# EAGLE board 117_04_TIMER_GATE (EAGLE 9.6.2)
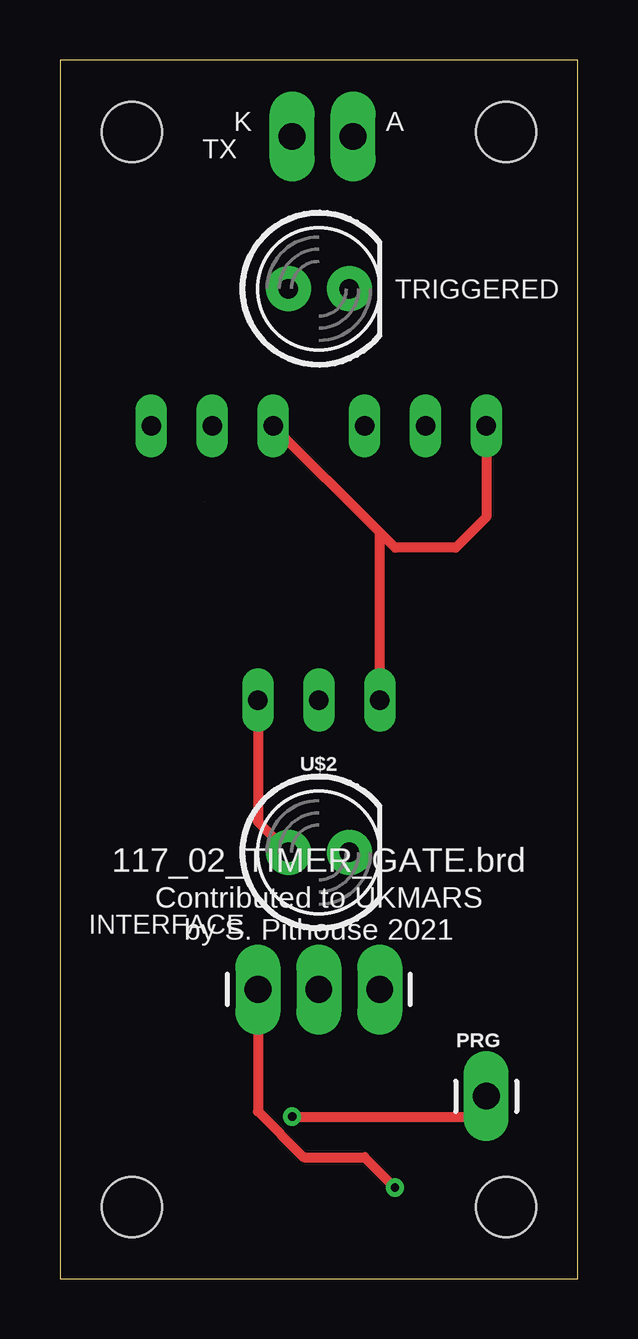
[diagram p0: board, top side]
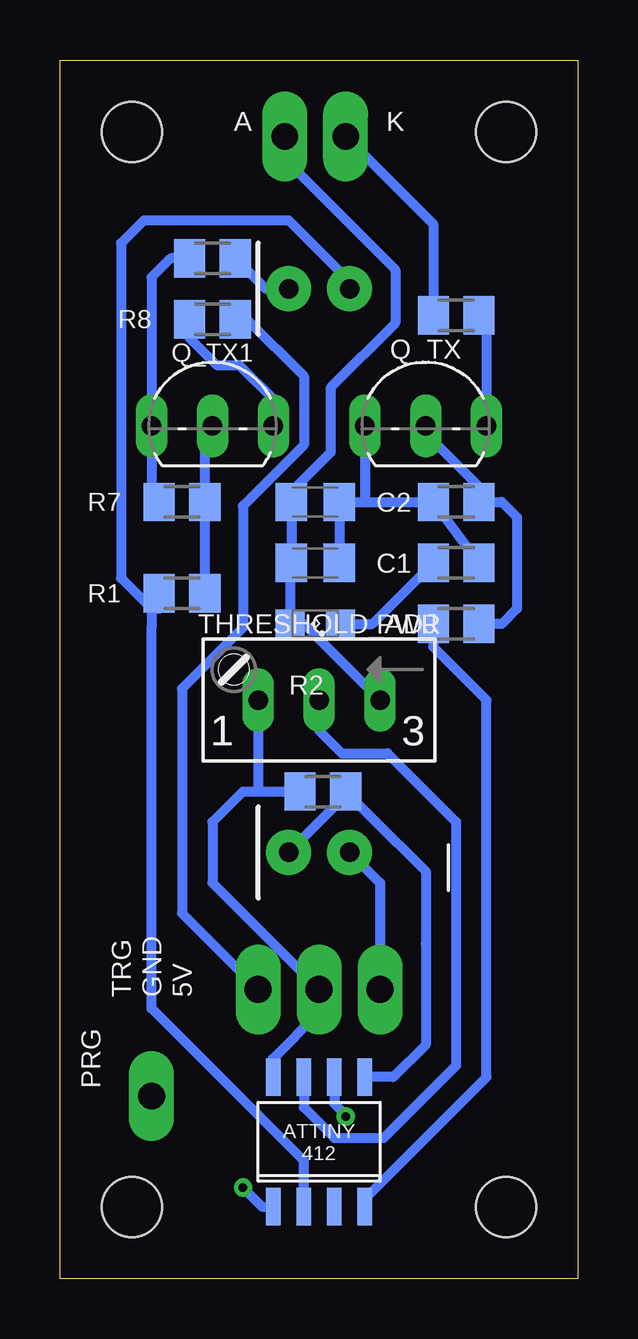
[diagram p1: board, bottom side, seen from below]

Size 21.6 x 50.81 mm. Coordinates in mm from the lower left corner, seen from the top.
Outline: 0,0 21.6,0 21.6,50.81 0,50.81 0,0
Copper layers (1*16): Top 0.035mm / dielectric 1.5mm / Bottom 0.035mm
Design rules "default *": minimum track width 6mil, minimum drill 0.35mm, track to track 6mil, track to pad 6mil, pad to pad 6mil, via to via 6mil, smd to smd 6mil, copper to edge 40mil, drill to drill 6mil, minimum pad ring 10mil, minimum via ring 8mil, stop-mask expansion 4mil, vias tented up to drill 50mil, thermal gap 10mil
Holes 2.5 mm at 18.6,3 18.6,47.81 3,47.81 3,3

## Footprints (pad centres in the part's own frame; a part is rotated, then mirrored left to right if it is on the bottom)
C0805K = smd 1.3 x 1.6: 1 -1,0; 2 1,0
1X03_LONGPADS = drill 1.118 pad 1.88 long: 1 0,0; 2 2.54,0; 3 5.08,0
1X01_LONGPAD = drill 1.118 pad 1.88 long: 1 0,0
SML0805 = smd 1.2 x 1.2: A 1.05,0; C -1.05,0
TO92-EBC = drill 0.813 long: B 0,-1.27; C 2.54,-1.27; E -2.54,-1.27
M0805 = smd 1.3 x 1.6: 1 -0.95,0; 2 0.95,0
S64W = drill 0.813 long: A 2.54,1.27; E -2.54,1.27; S 0,1.27
LED_5MM = drill 0.813 pad 1.88: A -1.27,0; K 1.27,0
1X02_LONGPADS = drill 1.118 pad 1.88 long: 1 0,0; 2 2.54,0
ATTINY412 = smd 1.55 x 0.6: P$1 -2.7,1.905; P$2 -2.7,0.635; P$3 -2.7,-0.635; P$4 -2.7,-1.905; P$5 2.7,-1.905; P$6 2.7,-0.635; P$7 2.7,0.635; P$8 2.7,1.905

## Placement (x,y rotation side)
C1  .1uF  [C0805K]  10.95,29.84 0 bottom
C2  .33uF  [C0805K]  10.95,32.38 0 bottom
INTERFACE  [1X03_LONGPADS]  13.34,12.06 180 top
PRG  [1X01_LONGPAD]  17.78,7.62 0 top
PWR  [SML0805]  10.95,27.3 180 bottom
Q_TX  PN2222  [TO92-EBC]  6.35,36.83 0 bottom
Q_TX1  PN2222  [TO92-EBC]  15.24,36.83 0 bottom
R1  390R  [M0805]  16.51,28.57 180 bottom
R2  330R  [M0805]  15.24,42.55 0 bottom
R3  10K  [M0805]  5.08,32.38 180 bottom
R4  390R  [M0805]  5.08,27.3 180 bottom
R5  330R  [M0805]  5.08,29.84 180 bottom
R6  10K  [M0805]  10.64,20.32 0 bottom
R7  10K  [M0805]  16.51,32.38 180 bottom
R8  390R  [M0805]  15.24,40.01 180 bottom
R9  390R  [M0805]  5.08,40.16 0 bottom
THRESHOLD_ADJ  [S64W]  10.79,25.4 180 bottom
TRIGGERED  [LED_5MM]  10.79,41.27 0 top
TX  [1X02_LONGPADS]  9.68,47.62 0 top
U$1  ATTINY412  [ATTINY412]  10.79,5.71 90 bottom
U$2  PHOTOTRANSISTOR  [LED_5MM]  10.79,17.78 0 top

## Library data of the parts
C1 C2 = rcl; SPICEPREFIX: C
INTERFACE PRG TX = SparkFun-Connectors
PWR = led
Q_TX Q_TX1 = transistor-neu-to92
R1-R9 = rcl; SPICEPREFIX: R
THRESHOLD_ADJ = pot
TRIGGERED = SparkFun-LED
U$1 U$2 = Stephen

## Nets
GATE_RX: R6.2 U$1.P$5 U$2.K
GATE_TX: R4.2 U$1.P$4
GND: C1.2 C2.2 INTERFACE.2 Q_TX1.E Q_TX.E R2.1 R3.2 R5.1 R6.1 R7.2 THRESHOLD_ADJ.A U$1.P$8
N$1: PWR.C R5.2
N$2: R9.1 TX.1
N$3: Q_TX1.B R1.1 R7.1
N$4: Q_TX.B R3.1 R4.1
N$5: Q_TX.C R9.2
N$6: Q_TX1.C R8.2
N$10: R2.2 TRIGGERED.K
PRG: PRG.1 U$1.P$6
THRESH: THRESHOLD_ADJ.S U$1.P$7
TRG_OUT: INTERFACE.1 R8.1
TRIGGERED: R1.2 TRIGGERED.A U$1.P$2
VDD: C1.1 C2.1 INTERFACE.3 PWR.A THRESHOLD_ADJ.E TX.2 U$1.P$1 U$2.A

## Tracks (layer width: path | path; a pad name or v marks a point on that pad's centre or on a via)
GATE_RX
  Bottom 0.406: U$1.P$5 7.7,8.41 6.35,9.76 6.35,13.97 6.35,16.98 8.65,19.29 R6.2 9.69,20.16 U$2.K
GATE_TX
  Bottom 0.406: R4.2 6.03,26.35 3.81,24.13 3.81,8.41 8.89,3.33 U$1.P$4
GND  (1 unrouted)
  Top 0.406: Q_TX1.E 17.78,31.75 16.51,30.48 13.97,30.48 13.34,31.11 | 13.34,31.11 Q_TX.E | THRESHOLD_ADJ.A 13.34,31.11
  Bottom 0.406: 5.87,32.23 R3.2 R5.1 | R7.2 17.78,32.7 Q_TX1.E 17.78,41.75 16.98,42.55 R2.1 | C1.2 C2.2 8.89,32.38 | R3.2 7.78,32.39 7.78,32.38 8.89,32.38 | THRESHOLD_ADJ.A 13.34,20.32 | 13.34,20.32 13.97,20.32 15.24,19.05 15.24,16.51 INTERFACE.2 10.79,11.1 12.72,9.18 12.72,8.44 U$1.P$8 | 13.34,20.32 R6.1 | Q_TX.E 8.89,32.38
N$1
  Bottom 0.406: PWR.C 8.57,27.3 R5.2
N$2
  Bottom 0.406: TX.1 6.03,43.97 R9.1
N$3
  Bottom 0.406: Q_TX1.B 15.56,35.24 R7.1 R1.1
N$4
  Bottom 0.406: Q_TX.B 6.35,35.24 4.13,33.02 R3.1 3.17,32.38 2.54,31.75 2.54,27.94 3.17,27.3 R4.1
N$5
  Bottom 0.406: R9.2 3.81,39.84 Q_TX.C
N$6
  Bottom 0.406: Q_TX1.C 12.7,36.67 14.13,38.1 15.08,38.1 16.19,39.21 R8.2
N$10
  Bottom 0.406: R2.2 13.02,41.27 TRIGGERED.K
PRG  (via drill 0.35)
  Top 0.406: v9.68,6.77 16.93,6.77 PRG.1
  Bottom 0.406: U$1.P$6 10.16,7.3 9.62,6.77 v9.68,6.77
THRESH
  Bottom 0.406: THRESHOLD_ADJ.S 10.79,22.86 9.84,21.91 7.94,21.91 5.08,19.05 5.08,13.97 5.08,8.89 8.1,5.87 10.16,5.87 11.43,7.14 U$1.P$7
TRG_OUT
  Bottom 0.406: R8.1 13.81,40.01 11.43,37.62 11.43,34.77 13.97,32.23 13.97,27.15 16.51,24.61 16.51,15.24 INTERFACE.1
TRIGGERED
  Bottom 0.406: R1.2 17.46,27.94 17.78,27.94 | 17.78,27.94 17.78,27.15 17.78,11.27 11.43,4.92 U$1.P$2 | TRIGGERED.A 9.53,41.59 12.06,44.13 18.1,44.13 19.05,43.18 19.05,29.21 17.78,27.94
VDD  (via drill 0.35)
  Top 0.406: INTERFACE.3 8.26,6.99 10.16,5.08 12.7,5.08 v13.97,3.81 | U$2.A 8.26,19.05 THRESHOLD_ADJ.E
  Bottom 0.406: THRESHOLD_ADJ.E 11.43,27.3 PWR.A 12,29.8 C1.1 C2.1 11.95,32.81 10.32,34.45 10.32,37.15 7.62,39.85 7.62,42.07 12.22,46.67 TX.2 | INTERFACE.3 8.26,16.51 U$2.A | v13.97,3.81 13.18,3.02 U$1.P$1

## Text on the board
bPlace: 5V | GND | TRG | PRG
tNames: K | A | 117_02_TIMER_GATE.brd | Contributed to UKMARS / by S. Pithouse 2021
bNames: K | A | R2